# EAGLE board ESCLAVO (EAGLE 6.2)
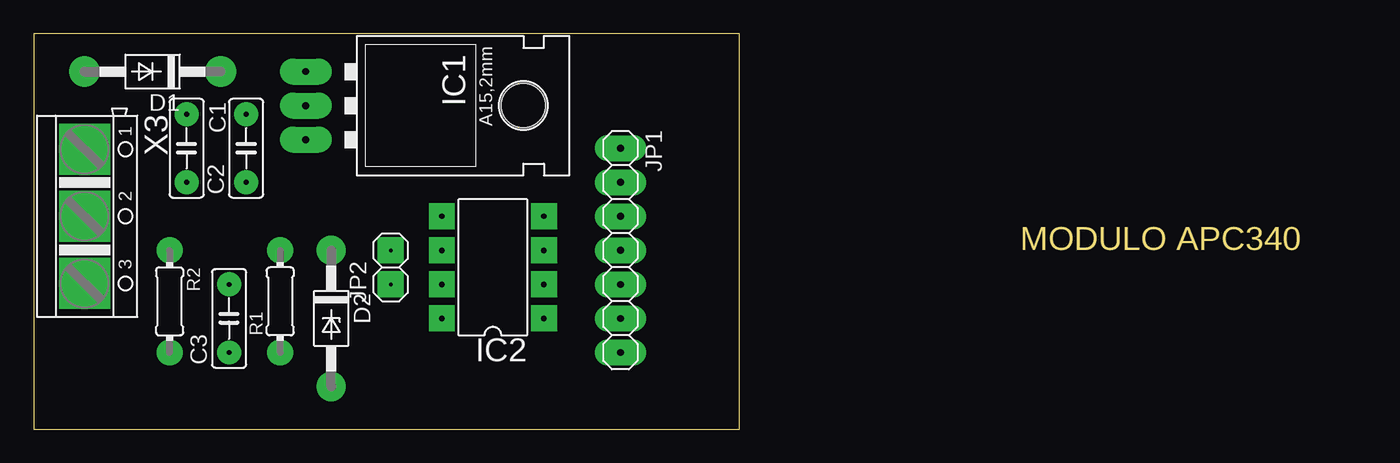
[diagram p0: board, top side]
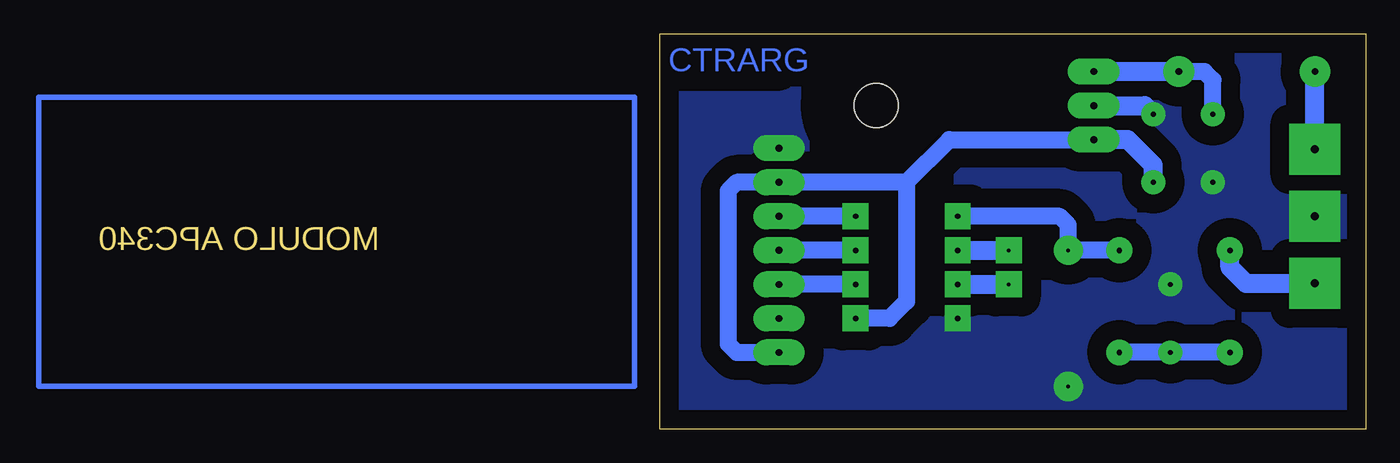
[diagram p1: board, bottom side, seen from below]

Size 52.69 x 29.52 mm. Coordinates in mm from the lower left corner, seen from the top.
Outline: 0,0 52.69,0 52.69,29.52 0,29.52 0,0
Copper layers (1*16): Top 0.035mm / dielectric 1.5mm / Bottom 0.035mm
Design rules: minimum track width 10mil, minimum drill 24mil, track to track 8mil, track to pad 8mil, pad to pad 8mil, via to via 8mil, smd to smd 8mil, copper to edge 40mil, drill to drill 8mil, minimum pad ring 10mil, minimum via ring 8mil, stop-mask expansion 4mil, vias tented up to drill 0mil, thermal gap 10mil

## Footprints (pad centres in the part's own frame; a part is rotated, then mirrored left to right if it is on the bottom)
C050-025X075 = drill 0.35 pad 1.778: 1 -2.54,0; 2 2.54,0
DO41-10 = drill 0.5 pad 2.286: A 5.08,0; C -5.08,0
DO41Z10 = drill 0.254 pad 2.184: A 5.08,0; C -5.08,0
78XXL = drill 0.5 pad 1.93 long: GND 0,-5.08; IN -2.54,-5.08; OUT 2.54,-5.08 | hole 3.302: 0,11.176
DIL8 = drill 0.4 pad 1.93 square: 1 -3.81,-3.81; 2 -1.27,-3.81; 3 1.27,-3.81; 4 3.81,-3.81; 5 3.81,3.81; 6 1.27,3.81; 7 -1.27,3.81; 8 -3.81,3.81
1X07 = drill 0.5 pad 1.93 long: 1 -7.62,0; 2 -5.08,0; 3 -2.54,0; 4 0,0; 5 2.54,0; 6 5.08,0; 7 7.62,0
1X02 = drill 0.254 pad 1.93 square: 1 -1.27,0; 2 1.27,0
0204/7 = drill 0.4 pad 1.93: 1 -3.81,0; 2 3.81,0
AK500/3 = drill 0.6 pad 3.81 square: 1 -5.004,0; 2 0,0; 3 5.004,0

## Placement (x,y rotation side)
C1  [C050-025X075]  11.43,20.95 270 top
C2  [C050-025X075]  15.88,20.95 90 top
C3  [C050-025X075]  14.61,8.26 90 top
D1  1N4004  [DO41-10]  8.89,26.67 180 top
D2  1N4728  [DO41Z10]  22.22,8.26 270 top
IC1  [78XXL]  25.4,24.13 270 top
IC2  PIC12F675P  [DIL8]  34.29,12.06 90 top
JP1  [1X07]  43.81,13.33 270 top
JP2  [1X02]  26.67,12.06 90 top
R1  [0204/7]  18.41,9.53 90 top
R2  [0204/7]  10.16,9.53 270 top
X3  [AK500/3]  3.81,15.88 270 top

## Library data of the parts
C1-C3 R1 R2 = rcl
D1 D2 = diode
IC1 = v-reg
IC2 = microchip
JP1 JP2 = pinhead
X3 = con-ptr500

## Nets
+5V: C2.1 IC1.OUT IC2.1 JP1.2 JP1.7
GND: C1.2 C2.2 C3.2 D2.A IC1.GND IC2.8 JP1.1 X3.2
N$1: IC2.2 JP1.5
N$2: IC2.3 JP1.4
N$3: IC2.4 JP1.3
N$4: D1.A X3.1
N$5: C1.1 D1.C IC1.IN
N$6: R2.1 X3.3
N$7: D2.C IC2.5 R1.2
N$8: C3.1 R1.1 R2.2
N$9: IC2.7 JP2.1
N$10: IC2.6 JP2.2

## Tracks (layer width: path | path; a pad name or v marks a point on that pad's centre or on a via)
+5V
  Bottom 1.27: JP1.7 46.99,5.72 47.62,6.35 47.62,17.78 46.99,18.41 JP1.2 34.29,18.41 | 34.29,18.41 31.11,21.59 IC1.OUT | 34.29,18.41 34.29,9.53 35.56,8.26 IC2.1
  Bottom 1.422: 19.05,21.59 IC1.OUT 17.78,21.59 15.88,19.69 C2.1
GND
  Bottom 1.422: IC1.GND 16.51,24.13 C2.2
  pour Bottom (isolate 1.422, no thermals): 0,29.21 52.7,29.21 52.7,0 0,0
N$1
  Bottom 1.27: IC2.2 JP1.5
N$2
  Bottom 1.27: IC2.3 JP1.4
N$3
  Bottom 1.27: IC2.4 JP1.3
N$4
  Bottom 1.422: X3.1 D1.A
N$5
  Bottom 1.27: C1.1 11.43,26.03 12.07,26.67 D1.C
  Bottom 1.422: D1.C IC1.IN
N$6
  Bottom 1.422: X3.3 8.97,10.87 10.16,12.06 R2.1
N$7
  Bottom 1.27: IC2.5 22.86,15.88 22.22,15.24 D2.C R1.2
N$8
  Bottom 1.27: R2.2 C3.1 R1.1
N$9
  Bottom 1.422: IC2.7 JP2.1
N$10
  Bottom 1.422: IC2.6 JP2.2
S$1
  Bottom 0.406: 54.61,24.77 54.61,3.18 99.06,3.18 99.06,24.77 54.61,24.77

## Text on the board
Bottom: CTRARG
Dimension: MODULO APC340
Document: GND | VCC | SET_A -> | RX -> | TX <- | AUX <- | SET_B ->